# EAGLE board BMSnew (EAGLE 9.4.2)
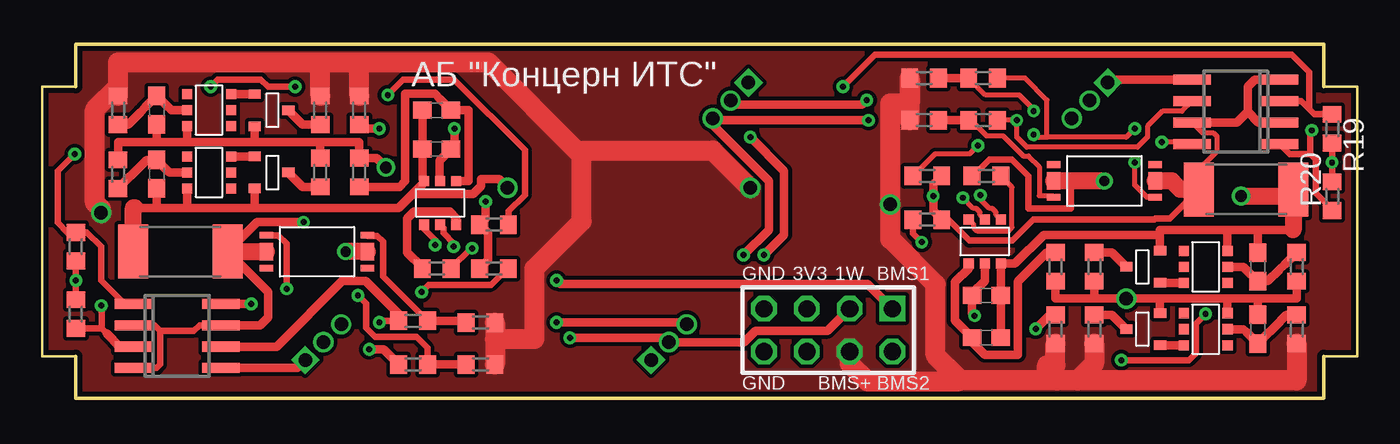
[diagram p0: board, top side]
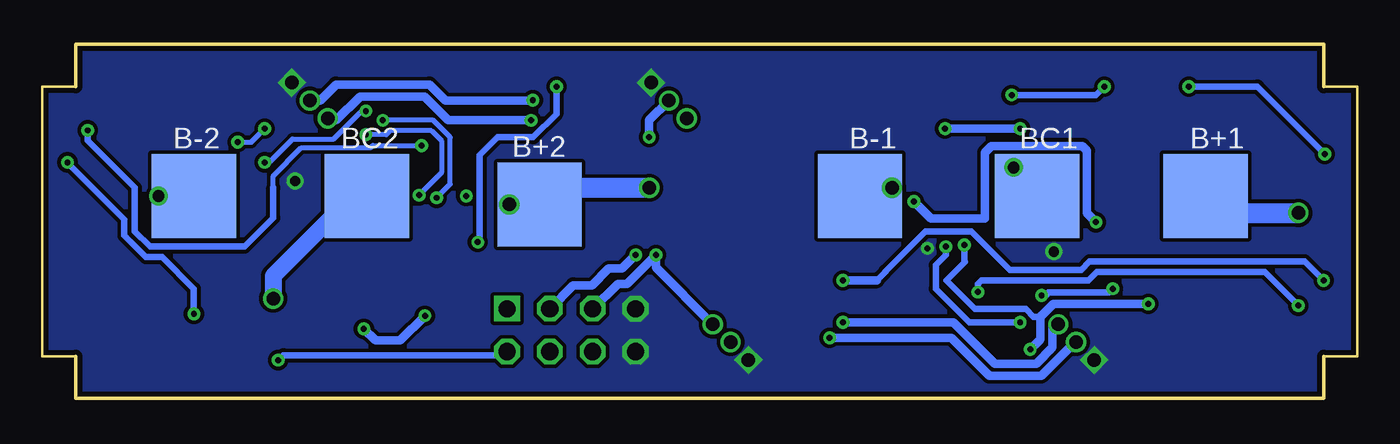
[diagram p1: board, bottom side, seen from below]

Size 78 x 21 mm. Coordinates in mm from the lower left corner, seen from the top.
Outline: 76,0 76,2.5 78,2.5 78,18.5 76,18.5 76,21 2,21 2,18.5 0,18.5 0,2.5 2,2.5 2,0 76,0
Copper layers (1*16): Top 0.035mm / dielectric 1.5mm / Bottom 0.035mm
Design rules "default *": minimum track width 0.3mm, minimum drill 0.35mm, track to track 0.22mm, track to pad 0.22mm, pad to pad 0.22mm, via to via 0.22mm, smd to smd 0.22mm, copper to edge 0.3mm, drill to drill 8mil, minimum pad ring 6mil, minimum via ring 8mil, stop-mask expansion 4mil, vias tented up to drill 0mil, thermal gap 10mil

## Footprints (pad centres in the part's own frame; a part is rotated, then mirrored left to right if it is on the bottom)
2X04 = drill 1.016 square: 1 -3.81,-1.27 | drill 1.016 octagon: 2 -3.81,1.27; 3 -1.27,-1.27; 4 -1.27,1.27; 5 1.27,-1.27; 6 1.27,1.27; 7 3.81,-1.27; 8 3.81,1.27
BATTERY = smd 5 x 5: P$1 0,0
C0603 = smd 1.1 x 1: 1 -0.85,0; 2 0.85,0
CONNECT1X3 = drill 0.8 pad 1.2 square: 1 -1.5,0 | drill 0.8 pad 1.2: 2 0,0; 3 1.5,0
R0603 = smd 1 x 1.1: 1 -0.85,0; 2 0.85,0
R2512 = smd 1.8 x 3.2: 1 -2.8,0; 2 2.8,0
FS8205A- = smd 0.4 x 0.8: 1 -0.975,-3; 4 0.975,-3; 5 0.975,3; 8 -0.975,3 | smd 1.05 x 0.8: 23 0,-3; 67 0,3
SOIC8 = smd 0.6 x 2.2: 1 -1.905,-2.6; 2 -0.635,-2.6; 3 0.635,-2.6; 4 1.905,-2.6; 5 1.905,2.6; 6 0.635,2.6; 7 -0.635,2.6; 8 -1.905,2.6
HY2120 = smd 0.6 x 0.6: 1 -0.95,-1.3; 2 0,-1.3; 3 0.95,-1.3; 4 0.95,1.3; 5 0,1.3; 6 -0.95,1.3
HY2213 = smd 0.6 x 0.6: 1 -0.95,-1.3; 2 0,-1.3; 3 0.95,-1.3; 4 0.95,1.3; 5 0,1.3; 6 -0.95,1.3
SI2302CDS = smd 0.56 x 0.73: 1 -0.95,-1; 2 0.95,-1; 3 0,1

## Placement (x,y rotation side)
AB1  [2X04]  46.62,4.04 180 top
B+1  BATTERY  [BATTERY]  9,12 0 bottom
B+2  BATTERY  [BATTERY]  48.5,11.5 0 bottom
B-1  BATTERY  [BATTERY]  29.5,12 0 bottom
B-2  BATTERY  [BATTERY]  69,12 0 bottom
BC1  BATTERY  [BATTERY]  19,12 0 bottom
BC2  BATTERY  [BATTERY]  58.75,12 0 bottom
C1  0,1µ  [C0603]  23.4,14.8 180 top
C2  0,1µ  [C0603]  23.4,17.1 180 top
C3  0,1µ  [C0603]  6.8,17.1 270 top
C4  0,1µ  [C0603]  6.8,13.3 270 top
C25  0,1µ  [C0603]  56,6.1 0 top
C26  0,1µ  [C0603]  56,3.6 0 top
C27  0,1µ  [C0603]  72.1,4.1 90 top
C28  0,1µ  [C0603]  72.1,7.8 90 top
DS18B20  CONNECT1X3  [CONNECT1X3]  37.17,3.33 45 top
DS18B20A  CONNECT1X3  [CONNECT1X3]  40.83,17.67 225 top
DS18B20B  CONNECT1X3  [CONNECT1X3]  16.67,3.33 45 top
DS18B20C  CONNECT1X3  [CONNECT1X3]  62.13,17.67 225 top
R1  2k  [R0603]  23.4,7.7 180 top
R2  330R  [R0603]  18.8,17.1 90 top
R3  330R  [R0603]  18.8,13.4 90 top
R4  100R  [R0603]  16.5,17.1 90 top
R5  100R  [R0603]  16.5,13.4 90 top
R6  100R  [R0603]  4.5,17.1 90 top
R7  100R  [R0603]  4.5,13.3 90 top
R8  R05  [R2512]  8.2,8.7 180 top
R9  100R  [R0603]  22,4.6 180 top
R10  100R  [R0603]  22,2 180 top
R11  100k  [R0603]  26,2 180 top
R12  100k  [R0603]  26,4.5 0 top
R13  2k26  [R0603]  2,5 90 top
R14  2k26  [R0603]  2,9 270 top
R15  100R  [R0603]  55.8,16.5 0 top
R16  100R  [R0603]  55.8,19 0 top
R17  100k  [R0603]  52.3,19 0 top
R18  100k  [R0603]  52.3,16.5 180 top
R19  2k26  [R0603]  76.5,16 270 top
R20  2k26  [R0603]  76.5,12 90 top
R49  2k  [R0603]  56,13.2 0 top
R50  330R  [R0603]  60.1,4.1 270 top
R51  330R  [R0603]  60.1,7.8 270 top
R52  100R  [R0603]  62.4,4.1 270 top
R53  100R  [R0603]  62.4,7.8 270 top
R54  100R  [R0603]  74.4,4.1 270 top
R55  100R  [R0603]  74.4,7.8 270 top
R56  R05  [R2512]  71.4,12.4 0 top
R94  200k  [R0603]  26.8,10.3 0 top
R95  200k  [R0603]  26.8,7.7 0 top
R98  200k  [R0603]  52.5,13.2 180 top
R99  200k  [R0603]  52.5,10.6 180 top
U$1  FS8205A-  [FS8205A-]  63,12.9 270 top
U$2  MOCD217M  [SOIC8]  8,3.7 270 top
U$3  HY2120  [HY2120]  23.6,11.6 0 top
U$4  HY2213  [HY2213]  9.9,17.1 270 top
U$5  HY2213  [HY2213]  9.9,13.4 270 top
U$6  SI2302CDS  [SI2302CDS]  13.6,17.1 270 top
U$7  SI2302CDS  [SI2302CDS]  13.6,13.4 270 top
U$10  MOCD217M  [SOIC8]  70.8,17 90 top
U$26  FS8205A-  [FS8205A-]  16.3,8.7 90 top
U$45  HY2120  [HY2120]  55.9,9.3 180 top
U$46  HY2213  [HY2213]  69,4.1 90 top
U$47  HY2213  [HY2213]  69,7.8 90 top
U$48  SI2302CDS  [SI2302CDS]  65.3,4.1 90 top
U$49  SI2302CDS  [SI2302CDS]  65.3,7.8 90 top

## Library data of the parts
AB1 = pinheadCS
B+1 B+2 B-1 B-2 BC1 BC2 DS18B20 DS18B20A DS18B20B DS18B20C U$1-U$7 U$10 U$26 U$45-U$49 = CanCubeSat
C1-C4 C25-C28 = rcl; SPICEPREFIX: C
R1-R7 R9-R20 R49-R55 R94 R95 R98 R99 = resistor
R8 R56 = rcl; SPICEPREFIX: R

## Nets
1W: AB1.3 DS18B20.2 DS18B20A.2 DS18B20B.2 DS18B20C.2
3V3: AB1.5 DS18B20.3 DS18B20A.3 DS18B20B.3 DS18B20C.3
B-1: B-1.P$1 C1.2 C2.2 C4.2 R8.2 U$3.6 U$5.3 U$7.2
B-2: B-2.P$1 C25.2 C26.2 C28.2 R56.2 U$45.6 U$47.3 U$49.2
BC1: BC1.P$1 C3.2 R3.2 R5.2 R7.2 U$4.3 U$6.2
BC2: BC2.P$1 C27.2 R51.2 R53.2 R55.2 U$46.3 U$48.2
BMS1: AB1.1 R13.2 R14.2
BMS2: AB1.2 R19.2 R20.2
BMS+: AB1.4 B+1.P$1 B+2.P$1 R2.2 R4.2 R6.2 R11.1 R12.2 R17.1 R18.2 R50.2 R52.2 R54.2
GND: AB1.7 AB1.8 DS18B20.1 DS18B20A.1 DS18B20B.1 DS18B20C.1 R1.1 R49.1 U$1.23 U$2.5 U$10.5 U$26.23
N$1: R10.1 R11.2 U$26.5
N$2: R9.1 R12.1 U$26.4
N$3: R20.1 R98.2 U$10.1
N$4: C1.1 R2.1 U$3.5
N$5: R49.2 U$45.3
N$6: C3.1 R6.1 U$4.2
N$7: U$4.6 U$6.1
N$8: C4.1 R7.1 U$5.2
N$9: U$5.6 U$7.1
N$10: R16.1 R17.2 U$1.5
N$11: R4.1 U$6.3
N$12: R5.1 U$7.3
N$13: R1.2 U$3.3
N$14: R15.1 R18.1 U$1.4
N$15: C2.1 R3.1 U$3.4
N$17: R14.1 R94.2 U$2.1
N$18: R13.1 R95.2 U$2.3
N$19: R19.1 R99.2 U$10.3
N$71: R52.1 U$48.3
N$85: R53.1 U$49.3
N$97: C25.1 R50.1 U$45.5
N$99: C27.1 R54.1 U$46.2
N$100: U$46.6 U$48.1
N$102: U$47.6 U$49.1
N$107: C26.1 R51.1 U$45.4
N$108: C28.1 R55.1 U$47.2
NO_GND1: R8.1 R94.1 R95.1 U$2.2 U$2.4 U$2.7 U$26.67
NO_GND2: R56.1 R98.1 R99.1 U$1.67 U$10.2 U$10.4 U$10.7
OC1: R9.2 U$2.6 U$3.2
OC2: R15.2 U$10.6 U$45.2
OD1: R10.2 U$2.8 U$3.1
OD2: R16.2 U$10.8 U$45.1

## Tracks (layer width: path | path; a pad name or v marks a point on that pad's centre or on a via)
1W  (via drill 0.35)
  Top 0.5: DS18B20A.2 40.86,17.7 40.91,17.7 41.19,17.41 48.61,17.41 v48.9,17.7 | v31.3,3.59 36.91,3.59 DS18B20.2 37.78,3.33 37.79,3.32 41.62,3.32 42.3,4 46.58,4 AB1.3 | v42.8,8.5 44,9.7 44,13.5 v42,15.5
  Bottom 0.5: DS18B20B.2 16.75,3.33 18.75,1.33 21.83,1.33 24.09,3.59 v31.3,3.59 | v48.9,17.7 48.93,17.67 54.08,17.67 55.02,18.62 60.57,18.62 61.52,17.67 DS18B20C.2 | AB1.3 46.5,6.7 45.4,6.7 44.4,7.7 43.6,7.7 v42.8,8.5 | v42,15.5 42,16.5 DS18B20A.2
3V3  (via drill 0.35)
  Top 0.5: v49,16.5 39.88,16.5 DS18B20A.3 39.77,16.23 43.1,12.9 43.1,10 v41.6,8.5 | v30.5,4.5 38.12,4.5 DS18B20.3
  Bottom 0.5: DS18B20B.3 17.84,4.5 18.08,4.26 18.08,3.02 19.05,2.05 21.5,2.05 23.95,4.5 v30.5,4.5 | DS18B20C.3 60.96,16.5 60.55,16.5 59.15,17.9 55.32,17.9 53.92,16.5 v49,16.5 | AB1.5 43.86,6.8 43.3,6.8 v41.6,8.5 41.6,7.76 DS18B20.3
B-1  (via drill 0.8)
  Top 0.5: 21.98,12.13 22.65,12.8 U$3.6 22.55,13 C1.2 C2.2 | 5.5,11.3 6.8,11.3 | 6.8,11.3 8.6,11.3 | 8.6,11.3 12.6,11.3 | 12.6,11.3 21.15,11.3 21.93,12.07 21.98,12.13 | C4.2 6.8,11.3 | U$5.3 8.6,11.3 | U$7.2 12.6,11.3 | v27.6,12.5 27.1,13 26.02,13 26.02,12.6 25.55,12.13 21.98,12.13
  Top 1: R8.2 5.4,11.28 5.42,11.3 5.5,11.3
  Bottom 1.2: B-1.P$1 28.1,12 v27.6,12.5
B-2  (via drill 0.7)
  Top 0.5: C26.2 C25.2 U$45.6 57.7,8 59.4,9.7 66.3,9.7 | 74.2,10 72.1,10 | 72.1,10 70.3,10 | 70.3,10 66.3,10 66.3,9.7 | C28.2 72.1,10 | U$47.3 70.3,10 | U$49.2 66.3,9.7
  Top 1: 74.2,10 R56.2 73.8,12 v71.1,12
  Bottom 1: B-2.P$1 v71.1,12
BC1  (via drill 0.7)
  Top 0.5: R7.2 4.5,15.2 6.8,15.2 | 6.8,15.2 8.6,15.2 | 8.6,15.2 12.6,15.2 | 12.6,15.2 16.5,15.2 | 16.5,15.2 18.8,15.2 R3.2 19.83,14.25 v20.38,13.7 | R5.2 16.5,15.2 | C3.2 6.8,15.2 | U$4.3 8.6,15.2 | U$6.2 12.6,15.2
  Bottom 1.2: BC1.P$1 19,12.32 v20.38,13.7
BC2  (via drill 0.8)
  Top 0.5: R55.2 74.4,5.92 72.1,5.92 | 72.1,5.92 70.3,5.92 | 70.3,5.92 66.3,5.92 | 66.3,5.92 v64.3,5.92 62.3,5.92 | 62.3,5.92 60.1,5.92 R51.2 | R53.2 62.4,6.02 62.3,5.92 | U$48.2 66.3,5.92 | U$46.3 70.3,5.92 | C27.2 72.1,5.92
  Bottom 1: BC2.P$1 59.55,12 64.3,7.25 v64.3,5.92
BMS1  (via drill 0.35)
  Top 0.4: R13.2 v2,7 R14.2
  Top 0.5: AB1.1 48.94,6.8 30.7,6.8 v30.5,7
  Bottom 0.4: v2,7 3.12,8.12 15.88,8.12 16.38,7.62 20.62,7.62 22.9,9.9 25.63,9.9 28,7.53 28,7.5 28.5,7
  Bottom 0.5: v30.5,7 28.5,7
BMS2  (via drill 0.35)
  Top 0.4: R19.2 v76.5,14 R20.2 | v69,5 68.42,4.42 68.42,2.68 68,2.26 v64,2.26
  Bottom 0.4: v69,5 69,6.5 70.88,8.38 71.85,8.38 73.12,9.65 73.12,10.62 v76.5,14 | v64,2.26 63.7,2.56 50.64,2.56 AB1.2
BMS+  (via drill 0.8)
  Top 1.2: R6.2 4.5,18.5 | 4.5,18.5 4.5,19.94 16.5,19.94 | 16.5,19.94 18.8,19.94 | R2.2 18.8,19.94 | R4.2 16.5,19.94 | R12.2 26.85,3.5 | 26.85,3.5 R11.1 | 18.8,19.94 26.48,19.94 31.7,14.71 | 31.7,14.71 32,14.41 32,10.5 29.2,7.7 29.2,3.5 26.85,3.5 | v3.5,11 3.5,11.24 3.13,11.61 3.13,17.13 4.5,18.5 | R54.2 74.4,1.06 61.4,1.06 | 61.4,1.06 60.2,1.06 | 60.2,1.06 59.6,1.66 59.6,1.96 60.1,1.96 R50.2 | R52.2 62.4,2.06 61.4,1.06 | 54.3,1.24 54.48,1.06 60.2,1.06 | 54.3,1.24 52.98,2.56 52.98,6.76 50.3,9.44 v50.3,11.5 50.3,17.5 51.45,17.5 R17.1 R18.2 | AB1.4 47.89,2.07 48.96,1 54.3,1 54.3,1.24 | 31.7,14.71 39.77,14.71 v41.99,12.49
  Bottom 1.2: B+1.P$1 8,11 v3.5,11 | v50.3,11.5 B+2.P$1 47.51,12.49 v41.99,12.49
  pour Top (no thermals): 0,21 0,0 78,0 78,21
GND  (via drill 0.35, 0.6)
  Top 0.4: U$10.5 67.8,18.91 | R1.1 24.25,7.72 25.43,8.9 v25.5,8.9 | R49.1 55.21,13.2 56.18,14.17 57.52,14.17 58.5,13.19 58.5,11.27 61,11.27 61,12.9
  Top 0.5: U$2.5 15.14,1.79 DS18B20B.1 | U$10.5 63.36,18.91 DS18B20C.1
  Top 1: U$26.23 v18,8.7 | v63,12.9 61,12.9 U$1.23
  pour Bottom (no thermals): 0,21 0,0 78,0 78,21
N$1  (via drill 0.35)
  Top 0.4: U$26.5 14,9.68 14.5,9.18 v14.5,6.5 | R10.1 22.85,2.98 22.2,3.63 19.74,3.63 19.2,4.17 19.2,5.63 v18.72,6.11
  Top 0.5: R11.2 R10.1
  Bottom 0.4: v18.72,6.11 18.47,6.11 18.31,6.27 14.73,6.27 v14.5,6.5
N$2
  Top 0.4: U$26.4 19.33,9.64 19.87,9.64 20.22,9.3 20.22,7.23 R9.1
  Top 0.5: R9.1 25.05,4.6 R12.1
N$3  (via drill 0.35)
  Top 0.3: v55.5,15 55,14.5 52.95,14.5 R98.2
  Top 0.4: U$10.1 74,14.5 75.19,14.5 | R20.1 76.5,11.21 75.53,12.18 75.53,14.16 75.19,14.5 | 75.19,14.5 75.19,15.79 v75.3,15.9
  Bottom 0.3: 64.3,12.5 64.3,13.2 62.63,14.87 58.52,14.87 58.39,15 v55.5,15
  Bottom 0.4: v75.3,15.9 75.3,15.3 72.5,12.5 72.5,9.91 71.59,9 66,9 64.3,10.7 64.3,12.5
N$4  (via drill 0.35)
  Top 0.5: R2.1 19.05,16 v20,16 | v24.45,16 24.45,15 C1.1 23.57,14.12 23.57,12.93 U$3.5
  Bottom 0.5: v20,16 v24.45,16
N$5
  Top 0.3: U$45.3 55.23,10.32 55.23,10.15 55.45,9.93 57.3,9.93 57.52,10.15 57.52,12.53 R49.2
N$6
  Top 0.5: U$4.2 7.67,17.1 7.5,17.27 7.48,17.27 C3.1 6.12,17.27 6.11,17.27 5.83,17 5.83,16.98 5.1,16.25 R6.1
N$7
  Top 0.5: U$4.6 U$6.1
N$8
  Top 0.5: R7.1 5.23,13.18 5.25,13.18 5.52,13.46 5.52,13.47 6.2,14.15 C4.1 7.48,13.47 7.5,13.47 7.57,13.4 U$5.2
N$9
  Top 0.5: U$5.6 U$7.1
N$10  (via drill 0.35)
  Top 0.3: U$1.5 65.5,11.93 65.51,11.94 64.8,12.65 v64.8,14 | v58.8,17.05 58.8,17.15 57.95,18 55.95,18 R16.1
  Top 0.5: R17.2 R16.1
  Bottom 0.3: v64.8,14 64.53,14 63.15,15.39 60.7,15.39 58.92,17.17 v58.8,17.05
N$11
  Top 0.5: U$6.3 15.45,16.25 R4.1
N$12
  Top 0.5: U$7.3 15.45,12.55 R5.1
N$13
  Top 0.5: R1.2 22.55,7.75 21.65,8.65 21.65,10.67 22.05,11.07 24.2,11.07 24.56,10.71 U$3.3
N$14
  Top 0.3: U$1.4 59.92,12.01 59.13,12.01 59.13,13.75 58.5,14.38 58.19,14.38 56.98,15.58 56,15.58 55.08,16.5 R15.1
  Top 0.5: R18.1 R15.1
N$15
  Top 0.5: U$3.4 25.3,12.9 25.3,17.1 C2.1 23.57,17.78 23.57,17.8 23.3,18.07 21.53,18.07 21.53,12.88 21.2,12.55 R3.1
N$17  (via drill 0.35)
  Top 0.4: U$2.1 4.89,5.61 3.5,7 3.5,9 2.65,9.85 R14.1 1.5,9.85 0.93,10.42 0.93,13.5 v1.93,14.5 | R94.2 27.65,11.1 28.62,12.08 28.62,14.72 24.43,18.92 21.42,18.92 v20.5,18 | v15,18.5 13.39,18.5 12.97,18.92 10.42,18.92 v10,18.5
  Bottom 0.4: v20.5,18 15.5,18 v15,18.5 | v10,18.5 5.93,18.5 v1.93,14.5
N$18  (via drill 0.35)
  Top 0.4: v22.5,6.3 22.93,6.73 26.62,6.73 27.59,7.7 R95.2 | R13.1 3.52,4.15 | 3.52,4.15 3.83,3.84 | v3.5,5.5 3.52,5.48 3.52,4.15
  Top 0.5: 3.83,3.84 4.61,3.06 U$2.3
  Bottom 0.4: v22.5,6.3 22.5,6.8 22.3,7 15.96,7 15.46,7.5 5.5,7.5 v3.5,5.5
N$19  (via drill 0.35)
  Top 0.4: U$10.3 74.67,17.64 75.15,17.15 | R19.1 75.45,16.85 75.15,17.15 | 75.15,17.15 75.15,19.35 74.1,20.4 49.4,20.4 v47.5,18.5 | v52.17,9.27 51.65,9.79 R99.2
  Bottom 0.4: v47.5,18.5 47.5,16.87 48.87,15.5 51,15.5 52.05,14.45 52.05,9.38 v52.17,9.27
N$71
  Top 0.5: U$48.3 63.45,4.95 R52.1
N$85
  Top 0.5: U$49.3 63.45,8.65 R53.1
N$97  (via drill 0.35)
  Top 0.5: U$45.5 55.9,6.96 55.15,6.21 C25.1 55.15,5.05 v55.3,4.9 | R50.1 59.75,4.95 v58.92,4.12
  Bottom 0.5: v58.92,4.12 58.22,3.42 56.77,3.42 v55.3,4.9
N$99
  Top 0.5: R54.1 73.8,4.95 73.07,4.22 73.07,4.21 72.8,3.93 72.78,3.93 C27.1 71.42,3.93 71.41,3.93 71.23,4.1 U$46.2
N$100
  Top 0.5: U$46.6 U$48.1
N$102
  Top 0.5: U$47.6 U$49.1
N$107
  Top 0.5: U$45.4 54.95,7.71 54.13,6.89 54.13,4.62 C26.1 55.15,3.33 55.9,2.58 57.87,2.58 57.87,2.59 57.87,6.92 59.6,8.65 R51.1
N$108
  Top 0.5: R55.1 73.67,7.92 73.66,7.92 73.38,7.64 73.38,7.63 72.7,6.95 C28.1 71.42,7.63 71.41,7.63 71.23,7.8 U$47.2
NO_GND1  (via drill 0.35)
  Top 0.4: U$2.4 6.79,1.79 7,2 7,4 | 7,4 6.67,4.33 U$2.2 | 7,4 9,4 9.34,4.33 U$2.7
  Top 0.5: U$2.7 12.94,4.33 13.4,4.8 13.4,6.3 R8.1 12.75,10.45 v15.5,10.45 | R95.1 26.45,8.2 26.45,9.8 R94.1 26.3,10.65 v26.3,11.68
  Top 1: R8.1 U$26.67
  Bottom 0.5: v15.5,10.45 16.03,10.98 16.03,14.7 16.3,14.97 21.7,14.97 22.08,14.58 22.08,10.68 25.3,10.68 v26.3,11.68
NO_GND2  (via drill 0.35)
  Top 0.3: R56.1 68.6,13.57 69.67,14.64 69.67,15.55 69.45,15.77 68.8,15.77 U$10.7
  Top 0.4: R56.1 66.87,10.67 66.02,10.67 65.95,10.6 58.78,10.6 57.54,9.36 55,9.36 53.76,10.6 R99.1
  Top 0.5: R98.1 52.85,12.7 v52.85,12 52.85,11.1 R99.1 | U$10.4 71.91,18.91 71.5,18.5 71.5,17 | U$10.2 72.14,16.36 71.5,17 | U$10.7 70.86,16.36 71.5,17
  Top 1: R56.1 67.5,12.4 67,12.9 U$1.67
OC1  (via drill 0.35)
  Top 0.4: U$3.2 23.8,10.1 23.8,9.8 24.4,9.2 v24.4,9 | v20,4.5 20.1,4.6 R9.2
  Top 0.5: U$2.6 13.9,3.06 17.79,6.96 19.19,6.96 21.15,5 R9.2
  Bottom 0.4: v24.4,9 24.4,8.5 25,7.9 25,6.5 23,4.5 v20,4.5
OC2  (via drill 0.35)
  Top 0.3: R15.2 v57.8,16.5 57.8,15.5 58.4,14.9 64.97,14.9 65.55,15.49 65.55,16.14 66.45,17.04 67.6,17.04 U$10.6 | v54.6,11.9 55.23,11.27 55.4,11.27 55.62,11.05 55.62,10.88 U$45.2
  Bottom 0.3: v54.6,11.9 53.8,12.7 53.8,15.5 54.8,16.5 v57.8,16.5
OD1  (via drill 0.35)
  Top 0.4: U$3.1 22.65,10.05 23.3,9.4 v23.3,9.1
  Top 0.5: v12.4,5.6 v12.39,5.61 U$2.8 | R10.2 20.25,2.9 v19.4,2.9
  Bottom 0.4: 18.8,4.83 19.2,4.83 19.67,5.3 22.68,5.3 24.38,7 23.29,8.09 23.3,8.1 v23.3,9.1
  Bottom 0.5: v19.4,2.9 18.8,3.5 18.8,4.83 18.04,5.6 v12.4,5.6
OD2  (via drill 0.35)
  Top 0.3: U$10.8 68.09,15.2 v66.4,15.2 | v64.8,16 64.3,15.5 59.6,15.5 | R16.2 58.3,19 59.6,17.7 59.6,15.5 | v55.65,12.05 55.65,11.8 56.18,11.27 56.35,11.27 56.57,11.05 56.57,10.88 U$45.1 | v58.8,15.65 58.95,15.5 59.6,15.5
  Bottom 0.3: v66.4,15.2 65.6,15.2 v64.8,16 | v58.8,15.65 57.59,15.65 57.36,15.88 54.92,15.88 54.32,15.29 54.32,13.38 v55.65,12.05

## Text on the board
tNames: АБ "Концерн ИТС" | GND | 3V3 | 1W | BMS1 | GND | BMS+ | BMS2